# Altium PCB PCB1.PcbDoc (part 1 of 3)
Units mm, origin at the board's own origin, x right, y up, seen from the top; angles counter-clockwise.
Board outline 72.9 x 52.07 mm, 2 copper layers (Top Layer, Bottom Layer); 22 components, 35 nets, 99 pads, 0 vias.
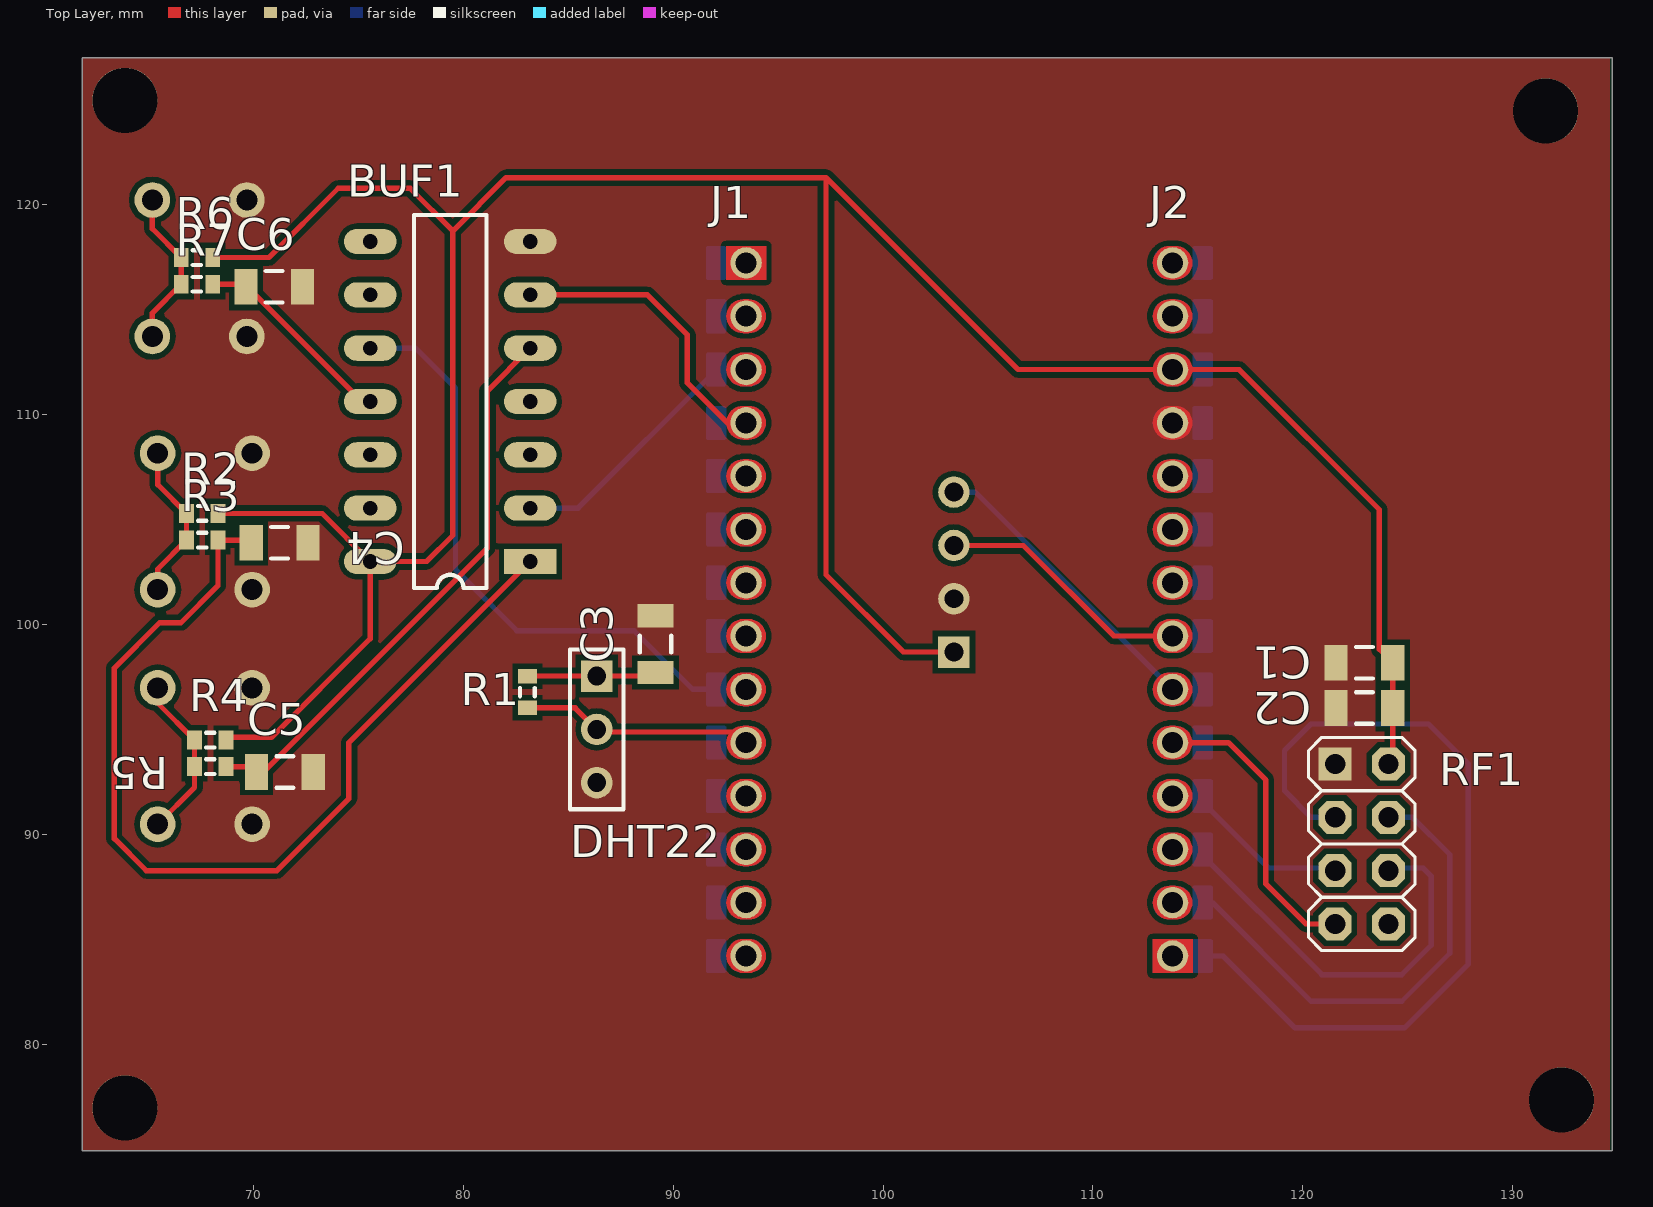
[diagram p0: Top Layer view]
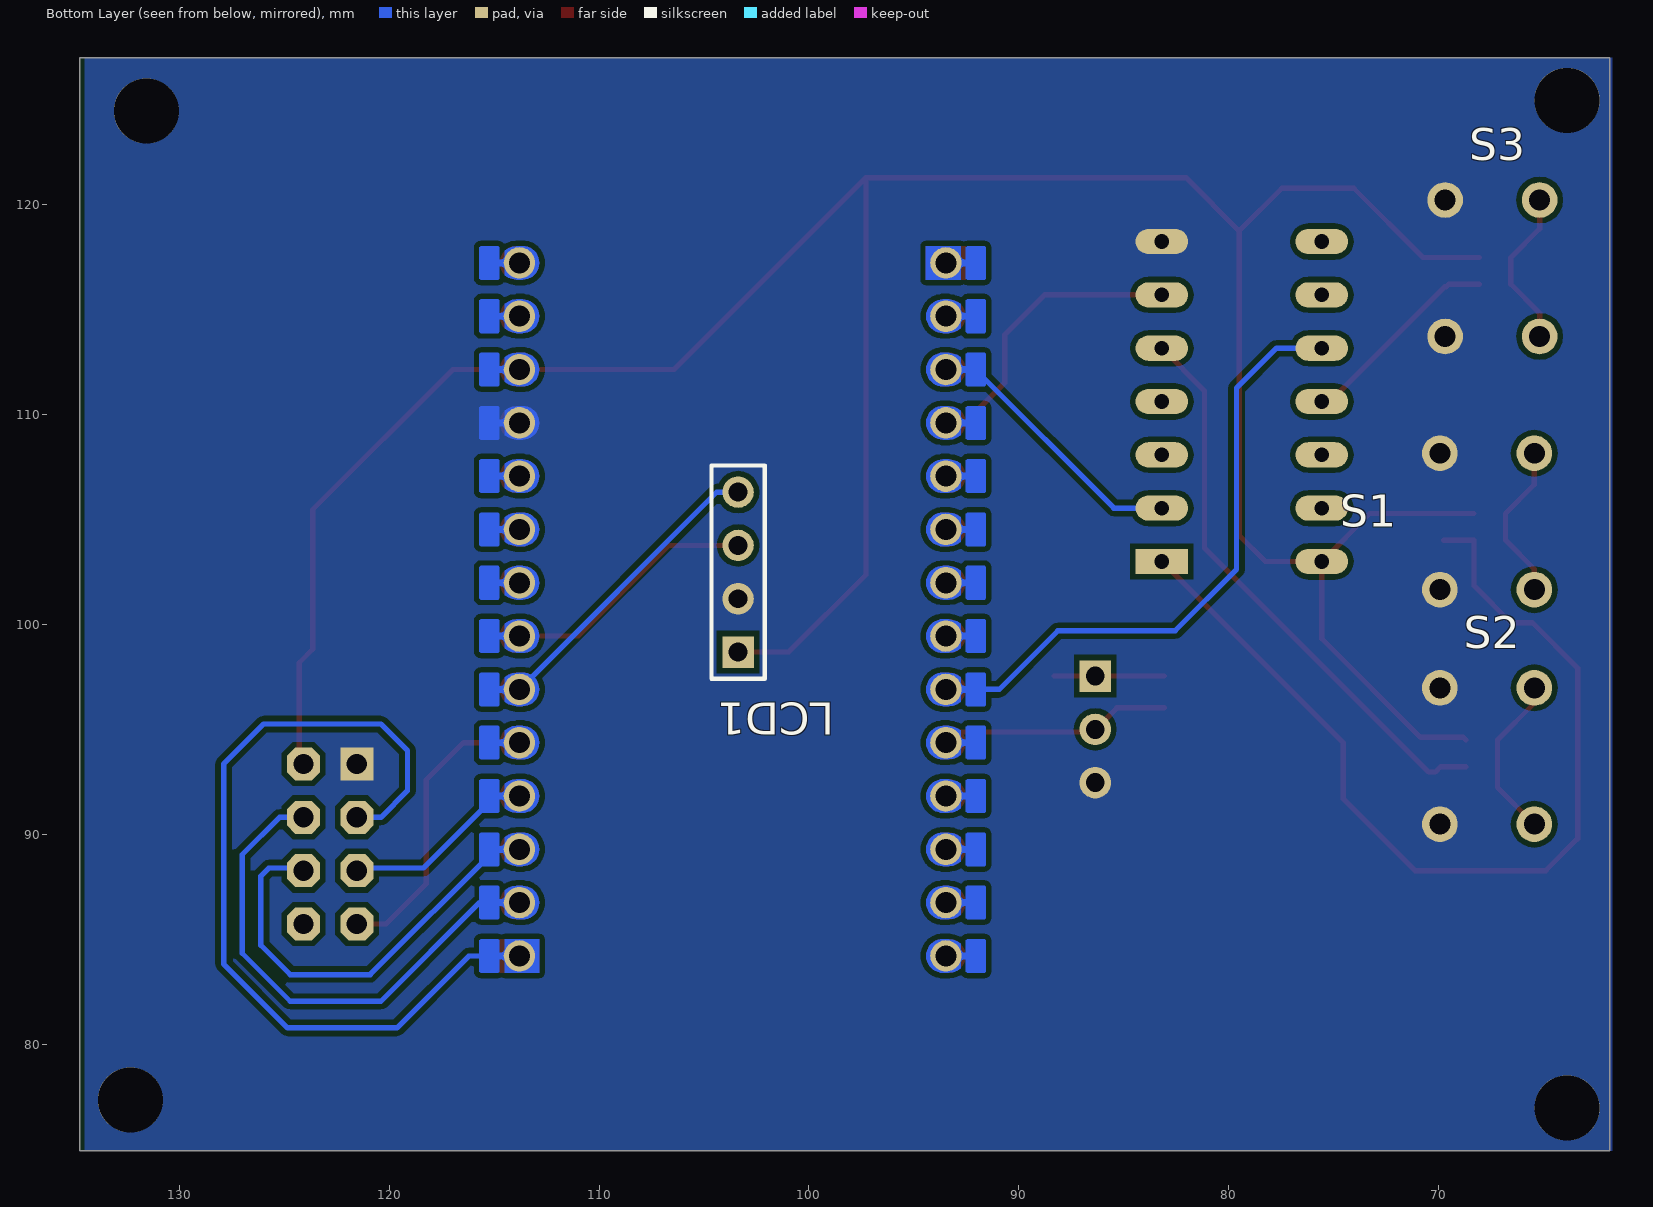
[diagram p1: Bottom Layer view, seen from below]

## Layer stack, top to bottom
Top Solder: solder mask 0.0102, Solder Resist, Dk 3.5
Top Layer: signal copper 0.0356
Dielectric 1: dielectric 0.32, FR-4, Dk 4.8
Bottom Layer: signal copper 0.0356
Bottom Solder: solder mask 0.0102, Solder Resist, Dk 3.5

## Board outline
61.849,74.93 134.747,74.93 134.747,127 61.849,127

## Design rules (kind name [scope] priority, off if disabled: settings)
Clearance [All] p1: gap=0.254
PlaneConnect [All] p1: planeconnectstyle=Direct reliefexpansion=0.508 reliefentries=4 reliefconductorwidth=0.254 reliefairgap=0.254
PolygonConnect [All] p1: connectstyle=Direct reliefconductorwidth=0.254 reliefentries=4 polygonreliefangle="90 Angle" airgapwidth=0.254
RoutingVias [All] p1: holewidth=0.711 width=1.27 viastyle="Through Hole" minholewidth=0.711 minwidth=1.27 maxholewidth=0.711 maxwidth=1.27
SolderMaskExpansion [All] p1: expansion=0.102
Width [All] p1: maxlimit=0.254 minlimit=0.254 preferedwidth=0.254
29 further rules are at their usual default settings.

## Components (designator, comment, footprint, x,y, rotation, side; value= is the part's Value field where it differs from the comment)
BUF1 "SN7406" DIP14 83.185,102.997 r180 top
C1 "Cap Semi" C1206 122.936,98.171 r180 top
C2 "Cap Semi" C1206 122.936,96.012 r180 top
C3 "Cap Semi" C1206 89.154,99.06 r270 top
C4 "Cap Semi" C1206 71.247,103.886 r180 top
C5 "Cap Semi" C1206 71.501,92.964 r180 top
C6 "Cap Semi" C1206 70.993,116.078 r180 top
DHT22 "Header 3" HDR1X3 86.36,97.536 r270 top
J1 "STRIP-14" STRIP-14 93.472,99.314 r0 top
J2 "STRIP-14" STRIP-14 113.792,102.108 r180 top
LCD1 "Header 4" HDR1X4 103.378,98.679 r90 bottom
R1 "Res3" J1-0603 83.058,96.774 r90 top
R2 "Res3" J1-0603 67.564,105.283 r0 top
R3 "Res3" J1-0603 67.564,104.013 r180 top
R4 "Res3" J1-0603 67.945,94.488 r0 top
R5 "Res3" J1-0603 67.945,93.218 r180 top
R6 "Res3" J1-0603 67.31,117.475 r0 top
R7 "Res3" J1-0603 67.31,116.205 r180 top
RF1 "4x2 M" 2X04 122.809,90.805 r270 top
S1 "SW-PB" 1080 67.691,104.902 r90 bottom
S2 "SW-PB" 1080 67.691,93.726 r90 bottom
S3 "SW-PB" 1080 67.437,116.967 r90 bottom

## Footprints (in the part's own frame and the unit in brackets; to place one, negate y for a bottom-side part, rotate by r counter-clockwise, add the part's x,y. Pads: shape width x height; smd on the part's side, far side on the other; paste and mask are expansions set on the pad)
2X04 [mil]
  rect 62x62 hole 38: 1(-100,-50)
  oct 62x62 hole 38: 2(-100,50) 3(0,-50) 4(0,50) 5(100,-50) 6(100,50) 7(200,-50) 8(200,50)
  silkscreen extent -150,-100 250,100
1080 [mm]
  round 1.7 hole 1: 1(-3.25,2.25) 1(3.25,2.25) 2(-3.25,-2.25) 2(3.25,-2.25)
C1206 [mm] "Chip Capacitor, Body 3.2x1.6mm, IPC High Density"
  rect 1.1x1.7 smd: 1(-1.35,0) 2(1.35,0)
  silkscreen extent -0.4,-0.75 0.4,0.75, body extent -1.7,-0.9 1.7,0.9, height 1.3
DIP14 [mm]
  rect 2.5x1.2 hole 0.7: 1(0,0)
  oval 2.5x1.2 hole 0.7: 2(0,-2.54) 3(0,-5.08) 4(0,-7.62) 5(0,-10.16) 6(0,-12.7) 7(0,-15.24) 8(7.62,-15.24) 9(7.62,-12.7) 10(7.62,-10.16) 11(7.62,-7.62) 12(7.62,-5.08) 13(7.62,-2.54) 14(7.62,0)
  silkscreen extent 2.08,-16.51 5.54,1.27
HDR1X3 [mm] "Connector; Header; 3 Position"
  rect 1.5x1.5 hole 0.9: 1(0,0)
  round 1.5 hole 0.9: 2(2.54,0) 3(5.08,0)
  silkscreen extent -1.27,-1.27 6.35,1.27
HDR1X4 [mm] "Connector; Header; 4 Position"
  rect 1.5x1.5 hole 0.9: 1(0,0)
  round 1.5 hole 0.9: 2(2.54,0) 3(5.08,0) 4(7.62,0)
  silkscreen extent -1.27,-1.27 8.89,1.27
J1-0603 [mm] "Chip Resistor, Body 1.6x0.8mm, IPC High Density"
  rect 0.7x0.9 smd: 1(-0.75,0) 2(0.75,0)
  silkscreen extent -0.2,-0.35 0.2,0.35, body extent -0.85,-0.48 0.85,0.48, height 0.9